# Altium PCB Dual Z.PcbDoc
Units mil, origin at the board's own origin, x right, y up, seen from the top; angles counter-clockwise.
Board outline 650 x 850 mil, 2 copper layers (Top Layer, Bottom Layer); 3 components, 4 nets, 12 pads, 0 vias.
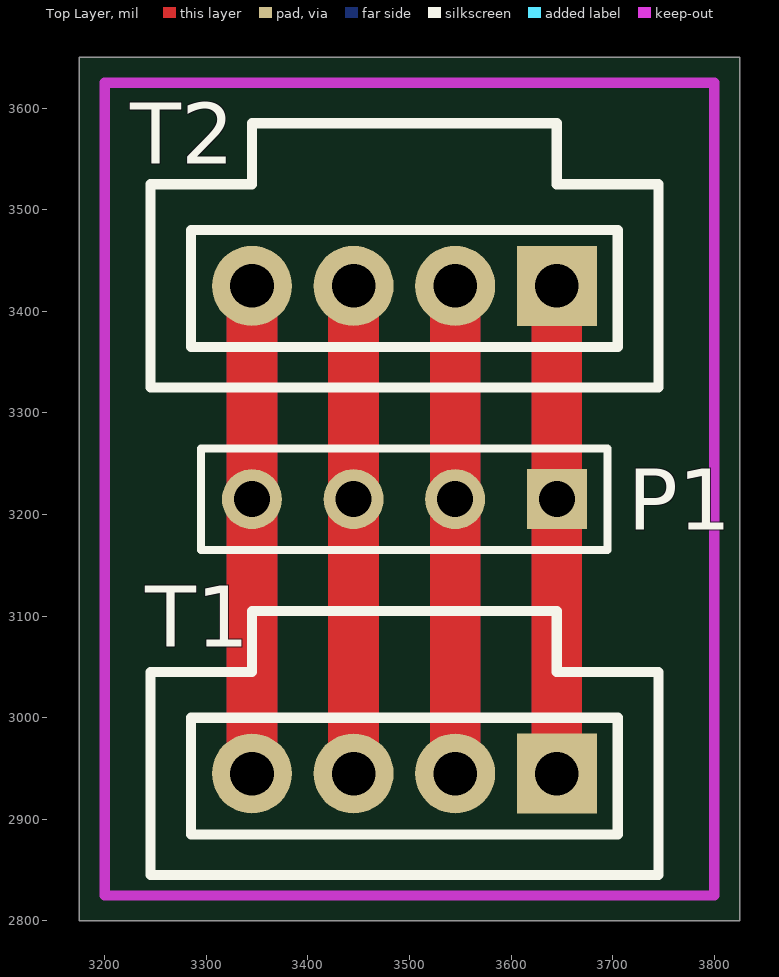
[diagram p0: Top Layer view]
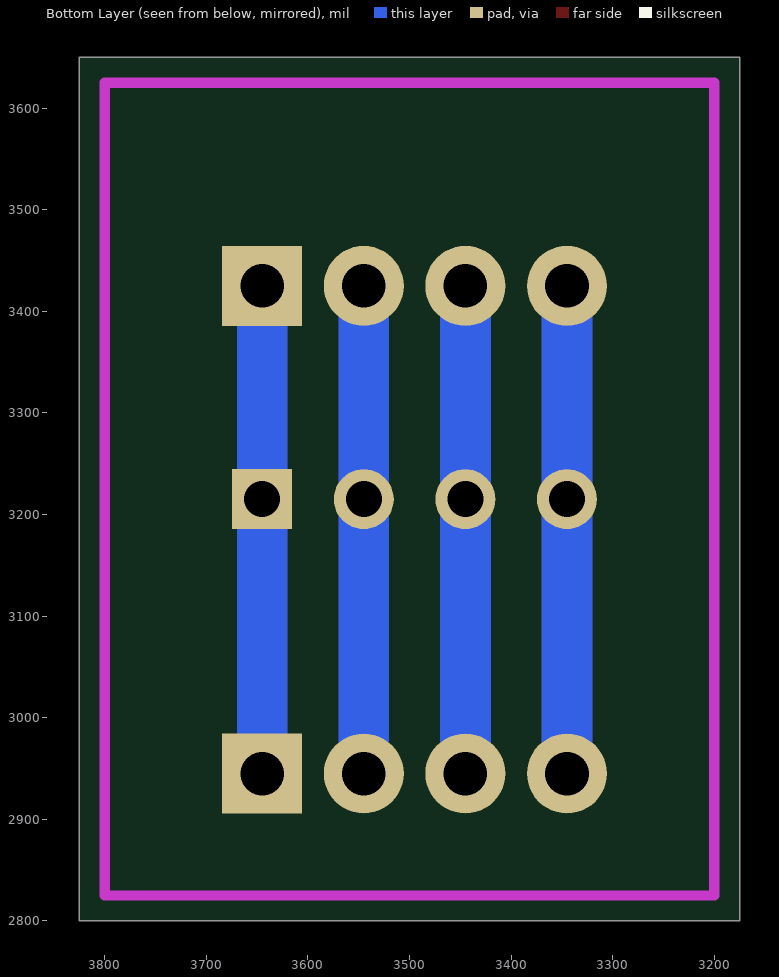
[diagram p1: Bottom Layer view, seen from below]

## Layer stack, top to bottom
Top Solder: solder mask 0.4, Solder Resist, Dk 3.5
Top Layer: signal copper 1.4
Dielectric 1: dielectric 12.6, FR-4, Dk 4.8
Bottom Layer: signal copper 1.4
Bottom Solder: solder mask 0.4, Solder Resist, Dk 3.5

## Board outline
3175,2800 3175,3650 3825,3650 3825,2800

## Design rules (kind name [scope] priority, off if disabled: settings)
Clearance [All] p1: gap=10
PolygonConnect [All] p1: connectstyle=Relief reliefconductorwidth=10 reliefentries=4 polygonreliefangle="90 Angle" airgapwidth=10
RoomDefinition "Dual Z" [InComponentClass('Dual Z')] p1: confinementstyle=ConfineIn formatcopy=TRUE lockcomponents=FALSE outline 3800,2825 3800,3625 3200,3625 3200,2825
RoutingVias [All] p1: holewidth=28 width=50 viastyle="Through Hole" minholewidth=28 minwidth=50 maxholewidth=28 maxwidth=50
SolderMaskExpansion [All] p1: expansion=4
UnpouredPolygon [All] p1: allowunpoured=FALSE
Width [All] p1: maxlimit=50 minlimit=7 preferedwidth=8
29 further rules are at their usual default settings.

## Components (designator, comment, footprint, x,y, rotation, side; value= is the part's Value field where it differs from the comment)
P1 "Header 4" HDR1X4 3645,3215 r180 top
T1 "Molex 0705430003" "Molex 0705430003" 3645,2945 r180 top
T2 "Molex 0705430003" "Molex 0705430003" 3645,3425 r180 top

## Footprints (in the part's own frame and the unit in brackets; to place one, negate y for a bottom-side part, rotate by r counter-clockwise, add the part's x,y. Pads: shape width x height; smd on the part's side, far side on the other; paste and mask are expansions set on the pad)
HDR1X4 [mm] "Connector; Header; 4 Position"
  rect 1.5x1.5 hole 0.9: 1(0,0)
  round 1.5 hole 0.9: 2(2.54,0) 3(5.08,0) 4(7.62,0)
  silkscreen extent -1.27,-1.27 8.89,1.27
"Molex 0705430003" [mm] "4 pin connector"
  rect 2x2 hole 1.09: 1(0,0)
  round 2 hole 1.09: 2(2.54,0) 3(5.08,0) 4(7.62,0)
  silkscreen extent -2.54,-4.06 10.16,2.54

## Part data
P1: "Header, 4-Pin"
T1 T2: library part "Molex 0705430003 Alt", "Molex 4 Pin Clip Connector"

## Nets (pads, with @x,y where several pads share a name; then routed paths per layer and width w, separated by ;. In a path a pad name is that pad's centre, name@x,y a point inside that pad or via, vN(x,y) a via of type N, cw(c..) or ccw(c..) an arc to the next point about the centre after c; other vN are vias at no path point)
NetP1_1: P1.1 T1.1 T2.1 | length 960
  Top Layer w50: T1.1@3645,2940 T1.1 P1.1 T2.1@3645,3420
  Bottom Layer w50: T1.1 P1.1 T2.1
NetP1_2: P1.2 T1.2 T2.2 | length 960
  Top Layer w50: T1.2@3545,2940 T1.2 P1.2 T2.2@3545,3420
  Bottom Layer w50: T1.2 P1.2 T2.2
NetP1_3: P1.3 T1.3 T2.3 | length 960
  Top Layer w50: T1.3@3445,2940 T1.3 P1.3 T2.3@3445,3420
  Bottom Layer w50: T1.3 P1.3 T2.3
NetP1_4: P1.4 T1.4 T2.4 | length 960
  Top Layer w50: T1.4 P1.4 T2.4
  Bottom Layer w50: T1.4 P1.4 T2.4

## Keep-outs
Keep-Out Layer:
  lines w10: 3200,2825 3800,2825 3800,3625 3200,3625 3200,2825